# EAGLE board cc2500 (EAGLE 7.1.0)
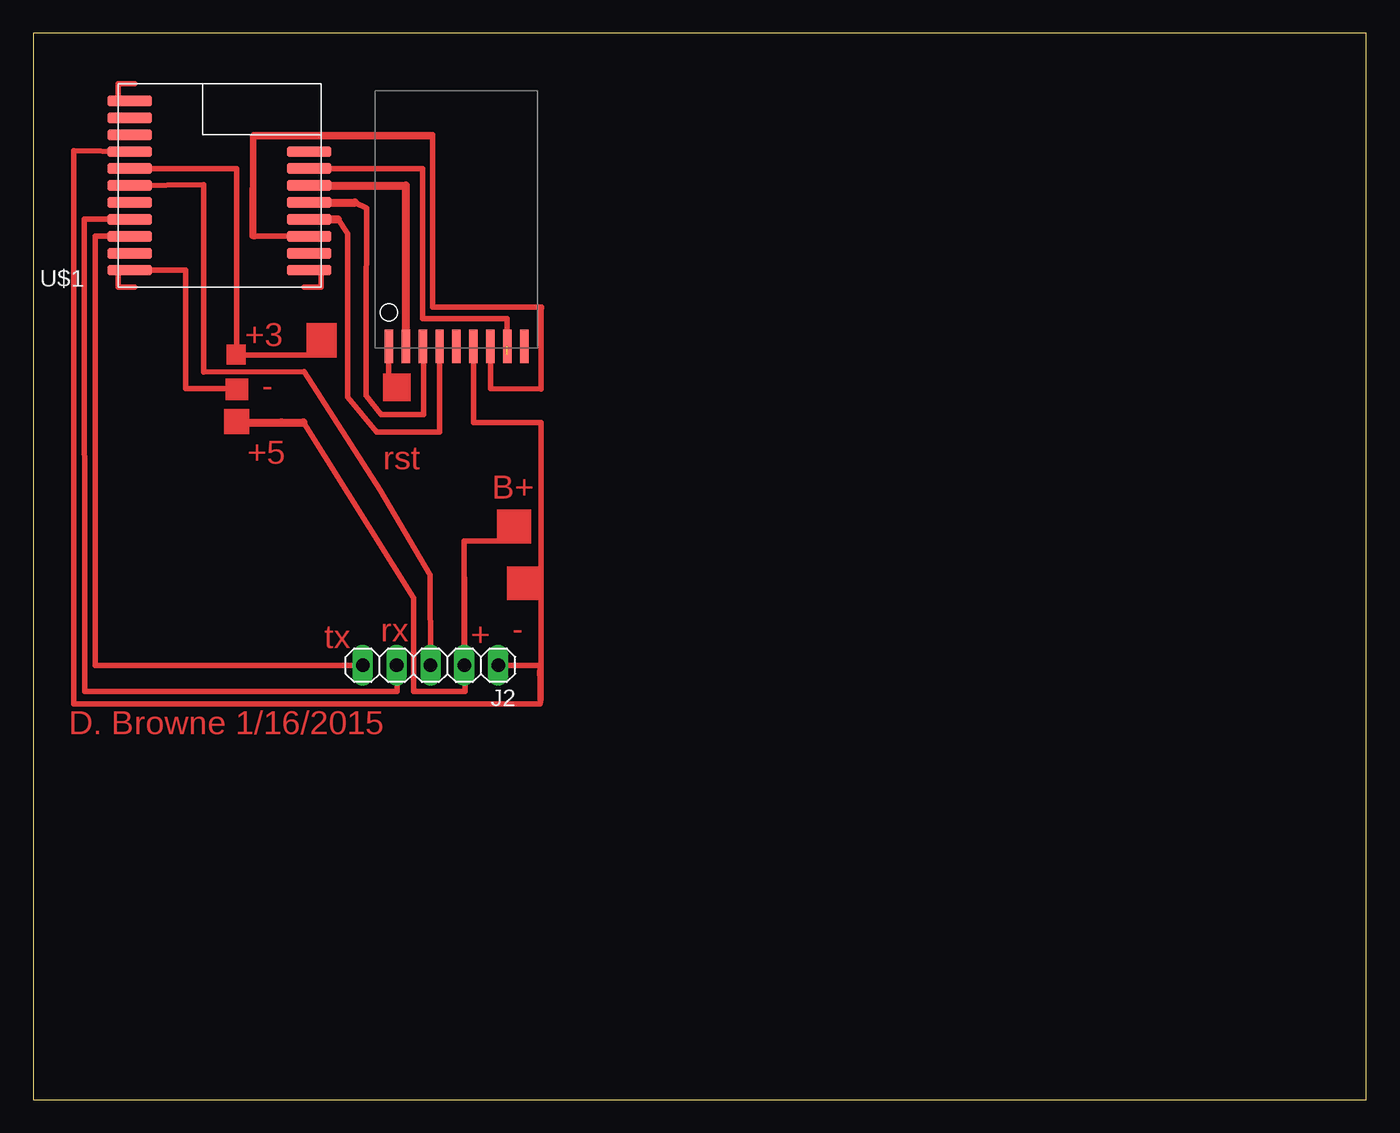
[diagram p0: board, top side]

Size 100 x 80 mm. Coordinates in mm from the lower left corner, seen from the top.
Outline: 0,0 100,0 100,80 0,80 0,0
Copper layers (1*16): Top 0.035mm / dielectric 1.5mm / Bottom 0.035mm
Design rules "default": minimum track width 10mil, minimum drill 24mil, track to track 8mil, track to pad 8mil, pad to pad 8mil, via to via 8mil, smd to smd 8mil, copper to edge 40mil, drill to drill 8mil, minimum pad ring 10mil, minimum via ring 8mil, stop-mask expansion 4mil, vias tented up to drill 0mil, thermal gap 10mil

## Footprints (pad centres in the part's own frame; a part is rotated, then mirrored left to right if it is on the bottom)
1X05 = drill 1.016 long: 1 -5.08,0; 2 -2.54,0; 3 0,0; 4 2.54,0; 5 5.08,0
RFD21733 = smd 3.353 x 0.813: P$1 -6.731,6.35; P$2 -6.731,5.08; P$3 -6.731,3.81; P$4 -6.731,2.54; P$5 -6.731,1.27; P$6 -6.731,0; P$7 -6.731,-1.27; P$8 -6.731,-2.54; P$9 6.731,-6.35; P$10 6.731,-5.08; P$11 6.731,-3.81; P$12 6.731,-2.54; P$13 6.731,-1.27; P$14 6.731,0; P$15 6.731,1.27; P$16 6.731,2.54; P$17 6.731,3.81; P$18 6.731,5.08; P$19 6.731,6.35
CC2500BOARD = smd 0.635 x 1.27: 1 -5.08,-10.16; 2 -3.81,-10.16; 3 -2.54,-10.16; 4 -1.27,-10.16; 5 0,-10.16; 6 1.27,-10.16; 7 2.54,-10.16; 8 3.81,-10.16; 9 5.08,-10.16; P$1 -5.08,-8.89; P$2 -3.81,-8.89; P$3 -2.54,-8.89; P$4 -1.27,-8.89; P$5 0,-8.89; P$6 1.27,-8.89; P$7 3.81,-8.89; P$8 2.54,-8.89; P$9 5.08,-8.89

## Placement (x,y rotation side)
J2  [1X05]  29.8,32.58 180 top
U$1  RFD22301  [RFD21733]  13.97,68.58 180 top
U$2  CC2500-RADIO  [CC2500BOARD]  31.75,66.04 0 top

## Library data of the parts
J2 = pinhead
U$1 = RFD22301-11.25.13
U$2 = cc2500-radio

## Nets
N$3: U$1.P$3 U$2.7
N$4: J2.1 U$1.P$12 U$2.6
N$5: J2.3 U$1.P$14
N$6: U$1.P$7 U$2.8
N$7: U$1.P$4 U$2.4
N$8: U$1.P$5 U$2.3
N$9: U$1.P$6 U$2.2
N$11: J2.4 U$1.P$16
N$12: J2.5 U$1.P$17
N$20: J2.2
S$1: U$1.P$13

## Tracks (layer width: path | path; a pad name or v marks a point on that pad's centre or on a via)
N$3
  Top 0.406: U$2.7 34.29,53.34 38.1,53.32 38.1,59.38 38.12,59.38 38.12,59.46 29.94,59.46 29.94,72.39 16.52,72.39 16.52,64.75 16.6,64.75 16.6,64.77 U$1.P$3
N$4
  Top 0.406: U$1.P$12 3.04,71.2 3.02,29.7 38.03,29.69 38.1,30.06 38.1,32.57 | U$2.6 33.02,50.8 38.1,50.8 38.1,32.57 | 38.1,32.57 38.11,32.57 | 38.11,32.57 38.11,30.06 | 38.11,32.7 38.11,33.94 | 38.11,32.57 38.11,32.7 | 38.11,32.7 38.09,32.78 38.09,30.39 38.02,30.01 38.03,31.67 37.98,31.89 38.01,32.56 J2.1
N$5
  Top 0.406: U$1.P$14 12.78,68.65 12.78,54.6 20.32,54.61 26.04,45.72 29.77,39.34 J2.3
N$6  (1 unrouted)
  Top 0.406: U$1.P$7 29.21,69.85 29.21,58.61 35.56,58.61 35.56,56.52 | U$2.8 35.55,55.64
N$7
  Top 0.406: 22.86,66.04 23.57,64.98 23.57,52.71 25.77,50.09 30.48,50.09 U$2.4
  Top 0.61: U$1.P$4 22.86,66.04
N$8
  Top 0.406: 29.27,56.91 U$2.3 29.27,55.88 29.27,51.4 26.84,51.4 26.11,51.41 24.99,52.82 24.99,58.24 24.99,66.89 24.13,67.31
  Top 0.61: U$1.P$5 24.13,67.31
N$9
  Top 0.61: U$1.P$6 27.94,68.58 U$2.2
N$11
  Top 0.406: U$1.P$16 3.81,66.04 3.85,30.63 27.3,30.61 J2.4
N$12
  Top 0.406: U$1.P$17 4.66,64.77 4.66,32.59 J2.5
N$13
  Top 0.406: 7.62,76.2 6.35,76.2 6.35,74.93
N$15
  Top 0.406: 7.62,62.23 11.43,62.23 11.43,53.34 15.24,53.34
N$16
  Top 0.406: 15.66,55.87 21.48,55.87 21.48,56.29
N$17
  Top 0.406: 6.35,62.23 6.35,60.96 7.62,60.96
N$18
  Top 0.406: 20.32,60.96 21.59,60.96 21.59,62.23
N$20
  Top 0.406: 20.27,50.8 28.54,37.62 28.52,30.62 32.38,30.62 32.38,31.26 32.31,41.92 | J2.2 32.31,41.92 | 32.31,41.92 34.29,41.91 36.83,41.91
  Top 0.61: 15.88,50.8 18.61,50.8 20.27,50.8
N$21
  Top 0.406: 26.67,55.65 26.67,53.54
N$22
  Top 0.406: 16.45,64.79 20.03,64.79
N$23
  Top 0.406: 16.44,72.15 16.43,64.79
N$24
  Top 0.406: 16.46,72.23 29.97,72.23 29.97,59.49
S$1
  Top 0.406: U$1.P$13 15.24,69.85 15.24,55.88
(copper drawn outside any net)
  shapes: Top area x7

## Text on the board
Top: +3 | - | +5 | rst | B+ | tx | rx | + | - | D. Browne 1/16/2015